# Altium PCB Pallette v0.5.PcbDoc
Units mm, origin at the board's own origin, x right, y up, seen from the top; angles counter-clockwise.
Board outline 110 x 12 mm, 2 copper layers (Top Layer, Bottom Layer); 68 components, 32 nets, 225 pads, 128 vias.
Unrouted connection lines stored in the file: 18.
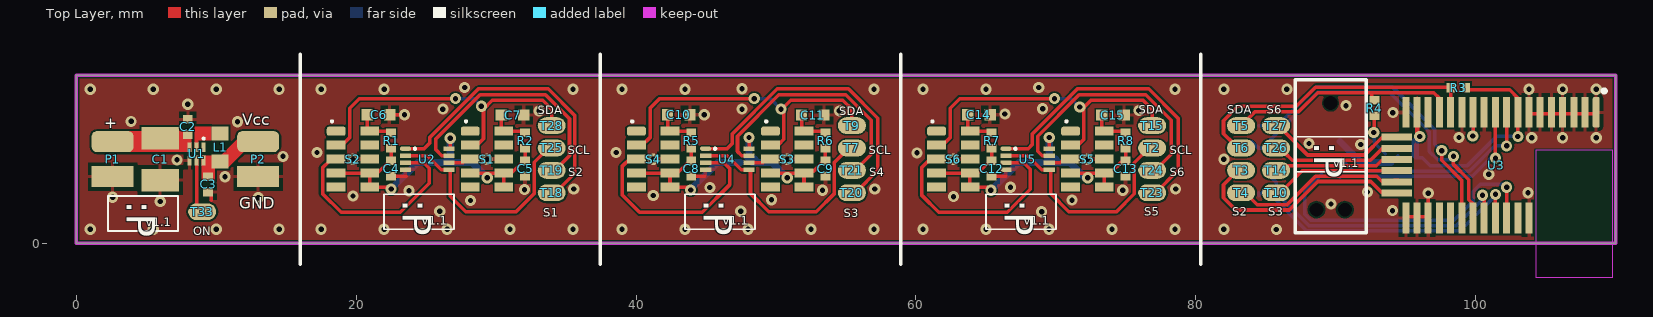
[diagram p0: Top Layer view]
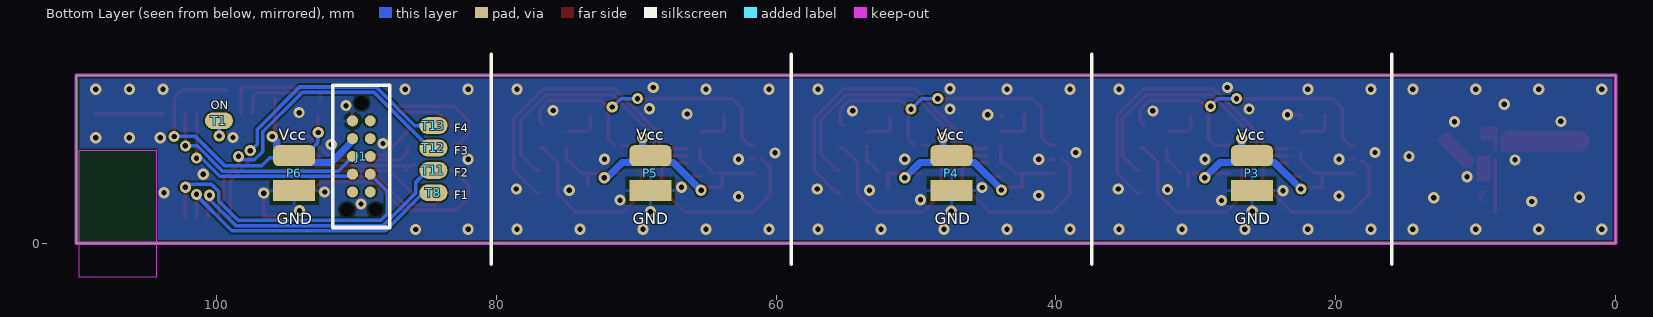
[diagram p1: Bottom Layer view, seen from below]

## Layer stack, top to bottom
Top Solder: solder mask 0.0102, Solder Resist, Dk 3.5
Top Layer: signal copper 0.0356
Dielectric 1: dielectric 0.32, FR-4, Dk 4.8
Bottom Layer: signal copper 0.0356
Bottom Solder: solder mask 0.0102, Solder Resist, Dk 3.5

## Board outline
0,0 110,0 110,12 0,12

## Design rules (kind name [scope] priority, off if disabled: settings)
Clearance [All] p1: gap=0.125
ComponentClearance [All] p1: gap=0.1 collisioncheckmode=3 verticalgap=0.1 showdistances=FALSE
MinimumSolderMaskSliver [All] p1: minsoldermaskwidth=0.125
PolygonConnect PolygonConnect_Vias [IsVia] p1: connectstyle=Direct reliefconductorwidth=0.254 reliefentries=4 polygonreliefangle="90 Angle" airgapwidth=0.254
PolygonConnect [All] p2: connectstyle=Relief reliefconductorwidth=0.254 reliefentries=4 polygonreliefangle="90 Angle" airgapwidth=0.254
RoutingVias [All] p1: holewidth=0.38 width=0.8 viastyle="Through Hole" minholewidth=0.356 minwidth=0.787 maxholewidth=0.711 maxwidth=1.27
SolderMaskExpansion [All] p1: expansion=0.102
Width [All] p1: maxlimit=2.54 minlimit=0.1 preferedwidth=0.254
28 further rules are at their usual default settings.

## Components (designator, comment, footprint, x,y, rotation, side; value= is the part's Value field where it differs from the comment)
C1 "100uF" 1411 6,6 r270 top
C2 "2.2uF" 0402 7.975,8.3 r270 top
C3 "2.2uF" 0402 9.425,4.2 r90 top
C4 "100nF" 0402 22.5,5.325 r90 top
C5 "100nF" 0402 32.075,5.325 r90 top
C6 "22uF" 0603 21.6,9.175 r180 top
C7 "22uF" 0603 31.175,9.15 r180 top
C8 "100nF" 0402 43.95,5.325 r90 top (schematic designator C4)
C9 "100nF" 0402 53.525,5.325 r90 top (schematic designator C5)
C10 "22uF" 0603 43.05,9.175 r180 top (schematic designator C6)
C11 "22uF" 0603 52.625,9.15 r180 top (schematic designator C7)
C12 "100nF" 0402 65.4,5.325 r90 top (schematic designator C4)
C13 "100nF" 0402 74.975,5.325 r90 top (schematic designator C5)
C14 "22uF" 0603 64.5,9.175 r180 top (schematic designator C6)
C15 "22uF" 0603 74.075,9.15 r180 top (schematic designator C7)
J1 "Header Program" TC2050-IDC-NL 89.625,6.2 r270 bottom
L1 "2.2uH" 0805 10.275,6.85 r270 top
P1 "Header Battery" "Battery Leads" 2.6,6 r0 top
P2 "Header Battery" "Battery Leads" 13,6 r0 top
P3 "Header Battery" "Battery Leads" 26,5 r180 bottom
P4 "Header Battery" "Battery Leads" 47.475,5 r180 bottom
P5 "Header Battery" "Battery Leads" 68.975,5 r180 bottom
P6 "Header Battery" "Battery Leads" 94.425,5 r180 bottom
R1 "30R" 0402 22.5,7.325 r270 top
R2 "30R" 0402 32.075,7.325 r270 top
R3 "4.7K" 0402 98.75,11.1 r0 top
R4 "4.7K" 0402 92.75,9.65 r270 top
R5 "30R" 0402 43.95,7.325 r270 top (schematic designator R1)
R6 "30R" 0402 53.525,7.325 r270 top (schematic designator R2)
R7 "30R" 0402 65.4,7.325 r270 top (schematic designator R1)
R8 "30R" 0402 74.975,7.325 r270 top (schematic designator R2)
S1 "Si1141-M01" SI1141-M01 29.35,6 r0 top
S2 "Si1141-M01" SI1141-M01 19.775,6 r0 top
S3 "Si1141-M01" SI1141-M01 50.8,6 r0 top (schematic designator S1)
S4 "Si1141-M01" SI1141-M01 41.225,6 r0 top (schematic designator S2)
S5 "Si1141-M01" SI1141-M01 72.25,6 r0 top (schematic designator S1)
S6 "Si1141-M01" SI1141-M01 62.675,6 r0 top (schematic designator S2)
T1 "TP 1.2X2MM" "TP 1.2x2MM" 99.8,8.75 r180 bottom
T2 "TP 1.2X2MM" "TP 1.2x2MM" 76.875,6.8 r0 top (schematic designator T25)
T3 "TP 1.2X2MM" "TP 1.2x2MM" 83.225,5.2 r0 top (schematic designator T1)
T4 "TP 1.2X2MM" "TP 1.2x2MM" 83.225,3.6 r0 top (schematic designator T1)
T5 "TP 1.2X2MM" "TP 1.2x2MM" 83.225,8.4 r0 top (schematic designator T1)
T6 "TP 1.2X2MM" "TP 1.2x2MM" 83.225,6.8 r0 top (schematic designator T1)
T7 "TP 1.2X2MM" "TP 1.2x2MM" 55.425,6.8 r0 top (schematic designator T25)
T8 "TP 1.2X2MM" "TP 1.2x2MM" 84.475,3.6 r0 bottom (schematic designator T1)
T9 "TP 1.2X2MM" "TP 1.2x2MM" 55.425,8.4 r0 top (schematic designator T28)
T10 "TP 1.2X2MM" "TP 1.2x2MM" 85.725,3.6 r0 top
T11 "TP 1.2X2MM" "TP 1.2x2MM" 84.475,5.2 r0 bottom
T12 "TP 1.2X2MM" "TP 1.2x2MM" 84.475,6.8 r0 bottom
T13 "TP 1.2X2MM" "TP 1.2x2MM" 84.475,8.4 r0 bottom
T14 "TP 1.2X2MM" "TP 1.2x2MM" 85.725,5.2 r0 top
T15 "TP 1.2X2MM" "TP 1.2x2MM" 76.875,8.4 r0 top (schematic designator T28)
T18 "TP 1.2X2MM" "TP 1.2x2MM" 33.975,3.6 r0 top
T19 "TP 1.2X2MM" "TP 1.2x2MM" 33.975,5.2 r0 top
T20 "TP 1.2X2MM" "TP 1.2x2MM" 55.425,3.6 r0 top (schematic designator T18)
T21 "TP 1.2X2MM" "TP 1.2x2MM" 55.425,5.2 r0 top (schematic designator T19)
T23 "TP 1.2X2MM" "TP 1.2x2MM" 76.875,3.6 r0 top (schematic designator T18)
T24 "TP 1.2X2MM" "TP 1.2x2MM" 76.875,5.2 r0 top (schematic designator T19)
T25 "TP 1.2X2MM" "TP 1.2x2MM" 33.975,6.8 r0 top
T26 "TP 1.2X2MM" "TP 1.2x2MM" 85.725,6.8 r0 top
T27 "TP 1.2X2MM" "TP 1.2x2MM" 85.725,8.4 r0 top
T28 "TP 1.2X2MM" "TP 1.2x2MM" 33.975,8.4 r0 top
T33 "TP 1.2X2MM" "TP 1.2x2MM" 9,2.25 r0 top
U1 "TPS62730" 6-UFDFN 8.6,6.375 r180 top
U2 "74LVC2G125" VSSOP8 25.075,6 r270 top
U3 "BLE113" BLE113-A 101.525,5.575 r270 top
U4 "74LVC2G125" VSSOP8 46.525,6 r270 top (schematic designator U2)
U5 "74LVC2G125" VSSOP8 67.975,6 r270 top (schematic designator U2)

## Footprints (in the part's own frame and the unit in brackets; to place one, negate y for a bottom-side part, rotate by r counter-clockwise, add the part's x,y. Pads: shape width x height; smd on the part's side, far side on the other; paste and mask are expansions set on the pad)
6-UFDFN [mm] "Body 1.5x1.0mm"
  rrect50% 0.3x0.7 smd mask+0.05: 1(-0.5,-0.475)
  rect 0.3x0.7 smd mask+0.05: 2(0,-0.475) 3(0.5,-0.475) 4(0.5,0.475) 5(0,0.475) 6(-0.5,0.475)
  silkscreen extent -0.53,-1.12 -0.48,-1.08, body extent -0.75,-0.5 0.75,0.5, height 0.6
0402 [mm] "Body 1.0x0.5mm, IPC High Density"
  rect 0.6x0.7 smd: 1(-0.55,0) 2(0.55,0)
  body extent -0.55,-0.3 0.55,0.3, height 1.3
0603 [mm] "Body 1.6x0.8mm, IPC High Density"
  rect 0.8x0.8 smd: 1(-0.8,0) 2(0.8,0)
  body extent -0.81,-0.46 0.81,0.46, height 1.3
0805 [mm] "Body 2.0x1.25mm, IPC High Density"
  rect 1x1.2 smd: 1(-1,0) 2(1,0)
  body extent -1.02,-0.65 1.02,0.65, height 1.3
1411 [mm] "Body 3.5x2.8mm, IPC High Density"
  rect 1.6x2.7 smd: 1(-1.5,0) 2(1.5,0)
  body extent -1.52,-1.4 1.52,1.4, height 1.3
"Battery Leads" [mm]
  rrect50% 3x1.5 smd paste-1.524: 1(0,1.25)
  rect 3x1.5 smd paste-1.524: 2(0,-1.25)
BLE113-A [mm] "Body 15.725x9.15mm"
  rrect50% 2.2x0.5 smd: 1(-3.775,7.075)
  rect 2.2x0.5 smd: 2(-3.775,6.275) 3(-3.775,5.475) 4(-3.775,4.675) 5(-3.775,3.875) 6(-3.775,3.075) 7(-3.775,2.275) 8(-3.775,1.475) 9(-3.775,0.675) 10(-3.775,-0.125) 11(-3.775,-0.925) 12(-3.775,-1.725) 13(-3.775,-2.525) 14(-3.775,-3.325) 15(-3.775,-4.125) 16(-3.775,-4.925) 17(-3.775,-5.725) 18(-3.775,-6.525) 25(3.775,-6.525) 26(3.775,-5.725) 27(3.775,-4.925) 28(3.775,-4.125) 29(3.775,-3.325) 30(3.775,-2.525) 31(3.775,-1.725) 32(3.775,-0.925) 33(3.775,-0.125) 34(3.775,0.675) 35(3.775,1.475) 36(3.775,2.275)
  rect 0.5x2.2 smd: 19(-2,-7.175) 20(-1.2,-7.175) 21(-0.4,-7.175) 22(0.4,-7.175) 23(1.2,-7.175) 24(2,-7.175)
  Keep-Out Layer region: -1.075,2.75 8.025,2.75 8.025,8.25 -1.075,8.25
  silkscreen extent -5.43,7.52 -5.17,7.78, body extent -4.57,-7.97 4.57,7.75, height 1.9
SI1141-M01 [mm] "Body 4.9x2.85mm"
  rrect50% 1.35x0.65 smd: 1(-1.2,2)
  rect 1.35x0.65 smd: 2(-1.2,1) 3(-1.2,0) 4(-1.2,-1) 5(-1.2,-2) 6(1.2,-2) 7(1.2,-1) 8(1.2,0) 9(1.2,1) 10(1.2,2)
  silkscreen extent -1.52,2.68 -1.48,2.72, body extent -1.43,-2.45 1.43,2.45, height 1.3
TC2050-IDC-NL [mil] "Programming pads"
  round 0 hole 39 unplated: 0(-150,0) 0(150,-40) 0(150,40)
  round 31 smd paste-50: 1(-100,-25) 2(-50,-25) 3(0,-25) 4(50,-25) 5(100,-25) 6(100,25) 7(50,25) 8(0,25) 9(-50,25) 10(-100,25)
  silkscreen extent -200,-80 200,80
"TP 1.2x2MM" [mm] "Body 1.2x2mm"
  oval 2x1.2 smd paste-10: 1(0,0)
VSSOP8 [mm] "Body 2.1x2.4mm"
  oval 0.3x0.8 smd mask+0.05: 1(-0.75,-1.55)
  rect 0.3x0.8 smd mask+0.05: 2(-0.25,-1.55) 3(0.25,-1.55) 4(0.75,-1.55) 5(0.75,1.55) 6(0.25,1.55) 7(-0.25,1.55) 8(-0.75,1.55)
  silkscreen extent -0.77,-0.9 -0.73,-0.85, body extent -1,-1.2 1,1.2, height 1

## Part data
C1: library part "Cap Pol 100uF", "CAP TANT POLY 100UF 8V 1411"
C2 C3: library part "Cap 2.2uF", "CAP CER 2.2UF 6.3V X5R 0402"
C4 C5 C8 C9 C12 C13: library part "Cap 100nF", "CAP CER 0.1UF 10V X5R 0402"
C6 C7 C10 C11 C14 C15: library part "Cap 22uF", "CAP CER 22UF 6.3V X5R 0603"
J1: "PADS PROGRAMMING"
L1: library part "Ind 2.2uH", "FIXED IND 2.2UH 800MA 120 MOHM"
P1 P2 P3 P4 P5 P6: "PADS BATTERY"
R1 R2 R5 R6 R7 R8: library part "Res 30R", "RES SMD 30 OHM 1% 1/16W 0402"
R3 R4: library part "Res 4.7K", "RES SMD 4.7K OHM 1% 1/16W 0402"
S1 S2 S3 S4 S5 S6: "SENSOR IR PROXIMITY AMB LT 10QFN"
T1 T2 T3 T4 T5 T6 T7 T8 T9 T10 T11 T12 T13 T14 T15 T18 T19 T20 T21 T23 T24 T25 T26 T27 T28 T33: "Test point"
U1: "IC DCDC CONV STP-DN SYNC LP 6SON"
U2 U4 U5: "IC BUS BUFF DVR TRI-ST DL 8VSSOP"
U3: "MODULE BT 4.0 BLE113 OTA"

## Via types
v1: diameter 0.8, hole 0.38, Top Layer to Bottom Layer, tented both sides, 128 vias

## Nets (pads, with @x,y where several pads share a name; then routed paths per layer and width w, separated by ;. In a path a pad name is that pad's centre, name@x,y a point inside that pad or via, vN(x,y) a via of type N, cw(c..) or ccw(c..) an arc to the next point about the centre after c; other vN are vias at no path point)
+2V1: C3.2 C4.2 C5.2 C8.2 C9.2 C12.2 C13.2 J1.2 L1.2 P2.1 P3.1 P4.1 P5.1 P6.1 R1.2 R2.2 R3.2 R4.2 R5.2 R6.2 R7.2 R8.2 S1.4 S1.6 S1.7 S2.4 S2.6 S2.7 S3.4 S3.6 S3.7 S4.4 S4.6 S4.7 S5.4 S5.6 S5.7 S6.4 S6.6 S6.7 U1.6 U2.8 U3.8 U3.17 U4.8 U5.8 | length 100
  Top Layer w0.254: S2.4@18.675,5 S2.7 ; S2.6@20.875,4 S2.6 v1@22.5,4 ; S2.6@20.975,4.1 S2.7 ; R1.2@22.5,6.525 22.5,6 21.5,5 S2.7 ; U2.8@26.725,6.75 v1@26.725,7.575 ; S1.4@27.65,5 S1.7@30.15,5 ; S1.6 S1.7 ; S1.7@31.075,5 C5.2@31.9,5.825 ; C5.2 R2.2 ; S4.4@40.125,5 S4.7@42.625,5 ; S4.6@42.325,4 v1@43.95,4 ; S4.6 S4.7 ; S4.7@42.875,4.925 C8.2@43.7,5.75 ; C8.2@43.95,5.725 R5.2@43.95,6.925 ; U4.8 v1@48.075,7.575 ; S3.4@49.7,5 S3.7@51.9,5 ; S3.6@52,3.975 S3.7@52,4.975 ; S3.7@52.65,5.125 C9.2@53.475,5.95 ; C9.2@53.525,5.725 R6.2@53.525,6.925 ; S6.4@61.575,5 S6.7@63.775,5 ; S6.7@64.075,5 63.85,5 63.85,4 v1@65.1,4 ; S6.7@64.4,5 C12.2@65.225,5.825 ; C12.2 R7.2 ; U5.8 v1@69.525,7.575 ; S5.4@71.15,5 S5.7 ; S5.6@73.45,4.1 S5.7 ; R8.2 C13.2 74.75,5.875 73.875,5 S5.7 ; v1@92.75,7.996 R4.2 ; U3.17@95.8,9.25 U3.17@95.8,10.35 ; R3.2@99.25,10.95 102.425,10.95 103,10.375 U3.8@103,9.25 ; v1(103.005,7.625) U3.8@103.005,9.245
  Top Layer w0.32: v1@95.8,7.625 U3.17@95.8,9.25
  Top Layer w1.016: L1.2@10.625,5.875 P2.1@12.125,7.375
  Bottom Layer w0.254: v1@22.375,3.75 v1(22.5,3.875) ; P3.1@26.325,6.15 P3.1@26.475,6 ; P4.1@47.775,6.15 P4.1@47.925,6 ; P5.1@69.225,6.15 P5.1@69.375,6 ; v1@92.75,8.004 92.75,7.175 P6.1@93.537,6.388 ; P6.1@93.925,5.75 P6.1 ; P6.1@95.675,6.1 96.175,6.1 96.745,5.53 99.376,5.53 ; 99.4,5.55 101.475,7.625 v1(103.005,7.625)
  Bottom Layer w0.508: v1(22.5,3.875) 24.375,5.75 28.3,5.75 v1(29.375,4.675) ; P3.1@26.725,6 v1@26.725,7.575 ; v1@43.9,3.825 45.825,5.75 P4.1@47.475,5.75 ; P4.1@48.075,6.025 v1@48.075,7.6 ; P4.1@48.225,6 P4.1@48.5,6 ; P4.1@48.275,5.75 49.725,5.75 v1@50.825,4.65 ; v1(65.35,3.775) 67.325,5.75 P5.1@68.975,5.75 ; P5.1@69.225,5.75 71,5.75 v1@72.15,4.6 ; P5.1@69.525,6.025 v1@69.525,7.6 ; P5.1@69.725,6 P5.1@70,6 ; J1.2@90.285,7.27 91.805,5.75 P6.1@93.925,5.75 ; P6.1@95.675,6.3 95.675,7.25 v1@96.05,7.625
  other v1: 43.9,3.8 50.8,4.675 72.275,4.675 26.725,7.5 48.075,7.55 69.525,7.55 96,7.625 92.7,7.9
FSR1: T8.1 U3.33 | length 21.2
  Top Layer w0.254: U3.33@101.4,1.9 v1@101.4,3.525
  Bottom Layer w0.254: T8.1 84.475,3.375 84.8,3.7 85.086,3.7 87.907,0.879 98.779,0.879 ; 98.879,0.879 v1@101.513,3.513
  other v1: 101.405,3.487
FSR2: T11.1 U3.32 | length 20.1
  Top Layer w0.254: U3.32@100.6,1.9 v1@100.6,3.425
  Bottom Layer w0.254: T11.1@84.925,5.175 85.727,4.373 85.727,3.595 88.064,1.258 98.608,1.258 v1@100.605,3.255
  other v1: 100.48,3.425
FSR3: T12.1 U3.31 | length 24
  Top Layer w0.254: v1(98.4,6.2) 98.4,5.625 99.502,4.523 99.502,3.098 99.8,2.8 U3.31@99.8,1.9
  Bottom Layer w0.254: T12.1@84.025,7.25 T12.1 84.75,6.8 88.725,10.775 93.85,10.775 94.05,10.575 96.675,7.95 96.675,6.553 97.28,5.948 v1@98.45,5.948
FSR4: T13.1 U3.30 | length 21.9
  Top Layer w0.254: v1@97.562,6.412 97.562,5.913 99,4.475 U3.30@99,1.9
  Bottom Layer w0.254: T13.1 85.8,8.4 88.557,11.157 94.043,11.157 97.075,8.125 97.075,7.075 v1@97.337,6.813 ; v1@97.337,6.613 v1@97.725,6.613
  other v1: 97.562,6.613
GND: C1.2 C2.1 C3.1 C4.1 C5.1 C6.1 C7.1 C8.1 C9.1 C10.1 C11.1 C12.1 C13.1 C14.1 C15.1 J1.1 P1.2 P2.2 P3.2 P4.2 P5.2 P6.2 S1.8 S2.8 S3.8 S4.8 S5.8 S6.8 U1.4 U2.4 U3.1 U3.2 U3.3 U3.4 U3.5 U3.6 U3.7 U3.11 U3.13 U3.18 U3.25 U3.26 U3.27 U3.36 U4.4 U5.4 | length 13.3
  Top Layer w0.254: C3.1@9.481,3.65 C3.1 9.65,3.425 9.65,3.075 ; C6.1@22.4,9.075 C6.1@22.502,8.973 ; C4.1 23.575,4.775 ; C6.1@22.5,9.175 v1@23.55,9.175 ; C10.1@43.85,9.075 C10.1@43.952,8.973 ; C8.1 44.9,4.775 ; C12.1 66.4,4.775 ; U3.25@95,1.9 96.6,1.9 v1@96.6,3.725 ; U3.7@103.8,9.25 U3.1@108.6,9.25
  other v1: 85.75,0.975 1,1 5.5,1 10,1 14.5,1 17.5,1 22,1 26.5,1 31,1 35.5,1 39,1 43.5,1 48,1 52.5,1 57,1 60.5,1 65,1 69.5,1 74,1 78.5,1 82,1 68.975,2.25 25.975,2.275 47.475,2.275 94.05,2.325 89.65,2.8 6,2.975 28.175,3.05 71.15,3.075 49.675,3.1 13,3.25 2.6,3.275 62.675,3.325 19.775,3.375 41.225,3.4 96.6,3.575 103.725,3.6 92.25,3.65 23.775,3.75 53.325,3.775 74.775,3.775 32.025,3.825 35.55,3.875 57.05,3.875 78.55,3.875 45.275,3.975 66.75,4 10.625,4.75 100.925,4.925 7.2,5.95 19.775,6 29.35,6 41.225,6 50.8,6 62.675,6 72.25,6 82,6 14.775,6.2 60.075,6.45 17.2,6.475 38.575,6.475 91.775,7.05 88.075,7.125 104,7.525 106.2,7.525 108.6,7.525 98.8,7.55 11.525,8.675 3.925,8.7 23.45,9.175 44.875,9.175 66.35,9.225 94.075,9.325 33.075,9.45 54.525,9.45 75.925,9.475 26.2,9.575 47.575,9.575 69.05,9.6 90.725,9.825 7.975,9.925 1,11 5.5,11 10,11 14.5,11 17.5,11 22,11 35.5,11 39,11 43.5,11 57,11 60.5,11 65,11 78.5,11 82,11 86.5,11 103.8,11 106.2,11 108.6,11 47.575,11.025 27.75,11.125 68.775,11.125
NetC6_2: C6.2 R1.1 S2.10 | length 2.8
  Top Layer w0.254: S2.10@20.8,8.075 C6.2 ; S2.10@20.875,8 S2.10 22.375,8 R1.1
NetC7_2: C7.2 R2.1 S1.10 | length 2.4
  Top Layer w0.254: S1.10@30.375,8.175 C7.2 ; S1.10 R2.1@31.95,8
NetC10_2: C10.2 R5.1 S4.10 | length 2.7
  Top Layer w0.254: S4.10@42.25,8.075 C10.2 ; S4.10@42.325,8 S4.10 R5.1@43.95,8
NetC11_2: C11.2 R6.1 S3.10 | length 2.6
  Top Layer w0.254: S3.10@51.825,8 C11.2@51.825,8.975 ; S3.10 53.4,8 R6.1
NetC14_2: C14.2 R7.1 S6.10 | length 2.8
  Top Layer w0.254: S6.10@63.7,8.075 C14.2 ; S6.10@63.775,8 S6.10 65.275,8 R7.1
NetC15_2: C15.2 R8.1 S5.10 | length 2.4
  Top Layer w0.254: S5.10@73.275,8.175 C15.2 ; S5.10 R8.1@74.85,8
NetL1_1: L1.1 U1.2 | length 0.8
  Top Layer w0.3: U1.2@8.6,6.75 8.6,7.525
NetS1_3: S1.3 U2.6 | length 1.2
  Top Layer w0.254: U2.6@26.45,5.75 S1.3@27.65,5.75
NetS2_3: S2.3 U2.3 | length 15.1
  Top Layer w0.254: S2.3@18.225,5.85 18.069,5.85 17.6,5.381 17.6,3.525 18.925,2.2 23.15,2.2 25.232,4.282 25.232,5.343 24.825,5.75 U2.3@23.45,5.75 ; S2.3@18.675,6 S2.3@19.025,6
NetS3_3: S3.3 U4.6 | length 1.2
  Top Layer w0.254: U4.6@47.9,5.75 S3.3@49.1,5.75
NetS4_3: S4.3 U4.3 | length 15.3
  Top Layer w0.254: S4.3@39.575,6.05 39,5.475 39,3.45 40.25,2.2 44.725,2.2 46.682,4.157 46.682,5.343 46.275,5.75 U4.3@44.9,5.75 ; S4.3@40.125,6 S4.3@40.475,6
NetS5_3: S5.3 U5.6 | length 1.3
  Top Layer w0.254: U5.6@69.35,5.75 70.3,5.75 S5.3@70.55,6
NetS6_3: S6.3 U5.3 | length 15.6
  Top Layer w0.254: S6.3@61.038,6.038 60.425,5.425 60.425,3.4 61.625,2.2 66.525,2.2 68.175,3.85 68.175,5.275 67.7,5.75 U5.3@66.35,5.75 ; S6.3@61.575,6 S6.3@61.925,6
P1_7/DCDC: T1.1 T33.1 U1.5 U3.12 | length 6.4
  Top Layer w0.254: T33.1@8.6,2.25 U1.5@8.6,6 ; v1@99.8,7.675 U3.12@99.8,9.25
  Bottom Layer w0.254: v1(99.775,7.65) T1.1@99.775,8.725
P2_1/PROG: J1.4 U3.10 | length 14.9
  Top Layer w0.254: v1@101.4,5.925 U3.10@101.4,9.25
  Bottom Layer w0.254: J1.4@90.285,4.73 J1.4@90.294,4.721 ; J1.4@90.294,4.771 90.3,4.765 91.109,4.765 94.292,4.765 99.71,4.765 ; 99.737,4.787 v1@101.238,6.288
  other v1: 101.4,6.075
P2_2/PROG: J1.3 U3.9 | length 15.2
  Top Layer w0.254: v1(102.2,6.95) U3.9@102.2,9.25
  Bottom Layer w0.254: J1.3@90.41,6 91.266,5.144 94.135,5.144 ; 94.135,5.144 99.544,5.144 101.35,6.95 v1(102.2,6.95)
R\E\S\E\T\: J1.7 U3.34 | length 21.6
  Top Layer w0.254: U3.34@102.2,1.9 v1(102.2,4)
  Bottom Layer w0.254: J1.7 87.775,3.715 87.775,2.083 88.221,1.637 98.437,1.637 99.8,3 99.8,3.667 100.333,4.2 102,4.2 v1(102.2,4)
S1_EN: T3.1 T18.1 U2.1 U3.24 | length 37.2
  Top Layer w0.254: U2.1@23.45,6.75 24.85,6.75 25.275,7.175 25.275,7.558 28.742,11.025 33.725,11.025 35.625,9.125 35.625,5 34.225,3.6 T18.1 ; T3.1 83,5.2 81.973,4.173 81.973,3.247 82.851,2.369 86.669,2.369 88.705,4.405 92.495,4.405 93.403,3.497 U3.24@93.722,3.497
S2_EN: T4.1 T19.1 U2.7 U3.23 | length 30.4
  Top Layer w0.254: U2.7@26.45,6.25 26.125,6.25 25.675,6.7 25.675,7.422 28.853,10.6 33.525,10.6 35.246,8.879 35.246,6.246 34.205,5.205 T19.1@34,5.205 ; T4.1@83.9,3.6 T4.1 83.525,3.6 84.377,2.748 86.512,2.748 88.548,4.784 92.916,4.784 93.378,4.322 U3.23@93.697,4.322 ; U3.23@94.186,4.475 U3.23@94.45,4.475
S3_EN: T10.1 T20.1 U3.22 U4.1 | length 30.5
  Top Layer w0.254: U4.1@44.9,6.75 46.5,6.75 46.869,7.119 46.869,7.802 50.092,11.025 55.175,11.025 57.275,8.925 57.275,8.9 57.275,5.2 55.675,3.6 T20.1 ; T10.1 86.025,3.6 87.588,5.163 93.7,5.163 U3.22@93.825,5.288
S4_EN: T14.1 T21.1 U3.21 U4.7 | length 25.9
  Top Layer w0.254: U4.7@47.9,6.25 47.55,6.25 47.248,6.552 47.248,7.645 50.203,10.6 54.975,10.6 56.8,8.775 56.8,6.35 55.655,5.205 T21.1@55.45,5.205 ; T14.1@85.85,5.667 85.975,5.542 92.892,5.542 93.375,6.025 U3.21@93.6,6.025 ; T14.1@86.325,5.2 T14.1@86.572,5.2
S5_EN: T23.1 T26.1 U3.20 U5.1 | length 30.1
  Top Layer w0.254: U5.1@66.35,6.75 68.025,6.75 68.319,7.044 68.319,7.802 71.542,11.025 76.625,11.025 78.725,8.925 78.725,8.9 78.725,5.2 77.125,3.6 T23.1 ; T26.1@86.325,6.8 86.325,6.475 86.879,5.921 92.471,5.921 U3.20@93.4,6.85 ; U3.20@93.375,6.85 U3.20@93.6,6.85 ; U3.20@94.342,6.792 U3.20@94.35,6.8 ; U3.20@94.35,6.875 U3.20@94.45,6.775
S6_EN: T24.1 T27.1 U3.19 U5.7 | length 26.7
  Top Layer w0.254: U5.7@69.35,6.25 69.025,6.25 68.698,6.577 68.698,7.645 71.653,10.6 76.425,10.6 78.25,8.775 78.25,6.35 77.105,5.205 T24.1@76.9,5.205 ; T27.1@86.325,8.4 86.325,7.95 87.975,6.3 92.05,6.3 93.353,7.603 U3.19@93.672,7.603
SCL: R3.1 T2.1 T6.1 T7.1 T25.1 U2.2 U2.5 U3.14 U4.2 U4.5 U5.2 U5.5 | length 70.4
  Top Layer w0.254: U2.2@23.45,6.25 25.075,6.25 26.075,5.25 U2.5@26.45,5.25 ; U2.5@26.725,5.25 26.725,3.35 27.825,2.25 31.425,2.25 32.723,3.548 32.723,3.953 32.725,3.955 32.725,4.845 32.723,4.847 32.723,5.773 33.75,6.8 T25.1 ; U4.2@44.9,6.25 46.525,6.25 47.525,5.25 48.175,5.25 48.175,3.55 49.475,2.25 52.875,2.25 54.173,3.548 54.173,3.953 54.175,3.955 54.175,4.845 54.173,4.847 54.173,5.773 55.2,6.8 T7.1 ; U5.2@66.35,6.25 67.975,6.25 68.975,5.25 69.625,5.25 69.625,3.55 70.925,2.25 74.325,2.25 75.6,3.525 75.6,5.75 76.65,6.8 T2.1 ; T6.1@82.85,7.155 82.645,7.155 81.973,7.827 81.973,8.753 82.995,9.775 87.175,9.775 88.55,11.15 98.15,11.15 R3.1 U3.14@98.2,9.975 ; U3.14@98.2,9.25 U3.14 U3.14@98.2,10.256
SDA: R4.1 S1.2 S2.2 S3.2 S4.2 S5.2 S6.2 T5.1 T9.1 T15.1 T28.1 U3.15 | length 86.9
  Top Layer w0.254: S2.2@18.675,7 19,7 19.55,7.55 19.55,9.65 20.225,10.325 v1(27.1,10.325) ; S1.2@27.65,7 28.65,7 29.1,7.45 29.1,9.575 29.725,10.2 33.325,10.2 33.975,9.55 33.975,8.675 T28.1@33.7,8.4 ; S4.2@40.125,7 40.45,7 41,7.55 41,9.65 41.675,10.325 v1(48.45,10.325) ; S3.2@49.1,7 S3.2@49.525,7 ; S3.2@50.175,7.05 50.55,7.425 v1@50.55,9.7 ; v1@50.25,9.4 v1@50.55,9.7 ; T9.1@55.15,8.4 55.425,8.675 55.425,9.55 54.775,10.2 51.05,10.2 v1@50.55,9.7 ; S6.2@61.575,7 61.9,7 62.45,7.55 62.45,9.65 63.125,10.325 v1(69.9,10.325) ; S5.2@70.55,7 S5.2@70.975,7 ; S5.2@71.575,7 72,7.425 72,9.7 72.5,10.2 76.225,10.2 76.875,9.55 76.875,8.675 T15.1@76.6,8.4 ; T5.1 84.221,9.396 87.332,9.396 88.693,10.757 96.993,10.757 97.4,10.35 U3.15@97.4,9.25 ; R4.1@92.575,10.2 92.575,10.696
  Bottom Layer w0.254: v1(27.1,10.325) 28.45,10.325 v1@29.05,9.725 ; v1(48.45,10.325) 49.6,10.325 v1(50.35,9.575) ; v1(69.9,10.325) 71.1,10.325 v1(71.7,9.725)
  other v1: 28.95,9.775
VBAT: C1.1 C2.2 P1.1 U1.3 | length 4.9
  Top Layer w1.5: P1.1 7.5,7.25
pads on no net: J1.0 J1.5 J1.6 J1.8 J1.9 J1.10 S1.1 S1.5 S1.9 S2.1 S2.5 S2.9 S3.1 S3.5 S3.9 S4.1 S4.5 S4.9 S5.1 S5.5 S5.9 S6.1 S6.5 S6.9 U1.1 U3.16 U3.28 U3.29 U3.35

## Polygon pours and split planes (outlines as drawn)
GND on Bottom Layer "Top Layer-GND" (solid, remove dead copper, pour order 22): -1.339,12.767 111.112,12.767 111.112,-1.547 30.924,-1.684 -1.339,-1.684
GND on Top Layer "Top Layer-No Net" (solid, remove dead copper, pour order 26): -0.457,12.675 -0.482,12.65 -0.482,-0.625 110.843,-0.625 110.868,-0.65 110.893,-0.625 110.893,12.8

## Keep-outs
Keep-Out Layer:
  the board outline again, w0.254

## Other copper
Top Layer:
  rectangle net NetL1_1: 8.45,7.35 9.675,8.35
  rectangle net +2V1: 8.95,4.425 9.9,6.25
  rectangle net VBAT: 7.25,6.5 8.125,7.2
  rectangle net VBAT: 8.125,6.5 8.25,7.775
  rectangle net VBAT: 7,7.35 7.875,8.05

## Silkscreen, mask and mechanical layers (free items; w line width, h text height)
Top Overlay:
  lines w0.125: 2.275,0.875 7.275,0.875 7.275,3.375 2.275,3.375 2.275,0.875 ; 22,1 22,3.5 27,3.5 27,1 22,1 ; 43.5,1 43.5,3.5 48.5,3.5 48.5,1 43.5,1 ; 65,1 65,3.5 70,3.5 70,1 65,1 ; 87.125,5.1 87.125,7.6 92.125,7.6 92.125,5.1 87.125,5.1
  lines w0.254: 16,-1.5 16,13.5 ; 37.45,-1.5 37.45,13.5 ; 58.9,-1.5 58.9,13.5 ; 80.35,-1.5 80.35,13.5
  text "SDA" at 75.925,9.25 h0.6
  text "SDA" at 82.225,9.25 h0.6
  text "S6" at 85.05,9.25 h0.6
  text "SDA" at 32.975,9.225 h0.6
  text "SDA" at 54.525,9.15 h0.6
  text "Vcc" at 11.875,8.425 h0.8
  text "+" at 2,8.2 h0.8
  text ":P" at 87.775,7.25 h3.5 r270
  text "SCL" at 35.123,6.37 h0.6
  text "SCL" at 56.623,6.37 h0.6
  text "SCL" at 78.123,6.37 h0.6
  text "v1.1" at 89.825,5.425 h0.6
  text "S2" at 35.148,4.77 h0.6
  text "S4" at 56.648,4.77 h0.6
  text "S6" at 78.148,4.77 h0.6
  text ":P" at 22.65,3.15 h3.5 r270
  text ":P" at 44.15,3.15 h3.5 r270
  text ":P" at 65.65,3.15 h3.5 r270
  text ":P" at 2.925,3.025 h3.5 r270
  text "GND" at 11.65,2.475 h0.8
  text "S2" at 82.6,1.975 h0.6
  text "S3" at 85.175,1.975 h0.6
  text "S5" at 76.325,1.95 h0.6
  text "S1" at 33.375,1.875 h0.6
  text "S3" at 54.85,1.85 h0.6
  text "v1.1" at 24.7,1.325 h0.6
  text "v1.1" at 46.2,1.325 h0.6
  text "v1.1" at 67.7,1.325 h0.6
  text "v1.1" at 4.975,1.2 h0.6
  text "ON" at 8.375,0.55 h0.6
Bottom Overlay:
  lines w0.254: 16,-1.5 16,13.5 ; 37.45,-1.5 37.45,13.5 ; 58.9,-1.5 58.9,13.5 ; 80.35,-1.5 80.35,13.5
  text "ON" at 100.4,9.575 h0.6
  text "F4" at 83,7.925 h0.6
  text "Vcc" at 27.05,7.35 h0.8
  text "Vcc" at 48.525,7.35 h0.8
  text "Vcc" at 70,7.35 h0.8
  text "Vcc" at 95.525,7.35 h0.8
  text "F3" at 83,6.325 h0.6
  text "F2" at 83,4.75 h0.6
  text "F1" at 83,3.15 h0.6
  text "GND" at 27.225,1.35 h0.8
  text "GND" at 48.675,1.35 h0.8
  text "GND" at 70.25,1.35 h0.8
  text "GND" at 95.675,1.35 h0.8
Board Outline:
  the board outline again, w0.254
Drill Drawing:
  text ".Legend" at 1.4,23.15 h1.52
V-Score:
  lines w0.254: 16,-1.5 16,13.5 ; 37.45,-1.5 37.45,13.5 ; 58.9,-1.5 58.9,13.5 ; 80.35,-1.5 80.35,13.5